# Altium PCB PCB_Bottom_Rev2.PcbDoc
Units mil, origin at the board's own origin, x right, y up, seen from the top; angles counter-clockwise.
Board outline 1110.07 x 1401.52 mil, 2 copper layers (Top Layer, Bottom Layer), stack 61.2 mil thick; 21 components, 19 nets, 80 pads, 19 vias.
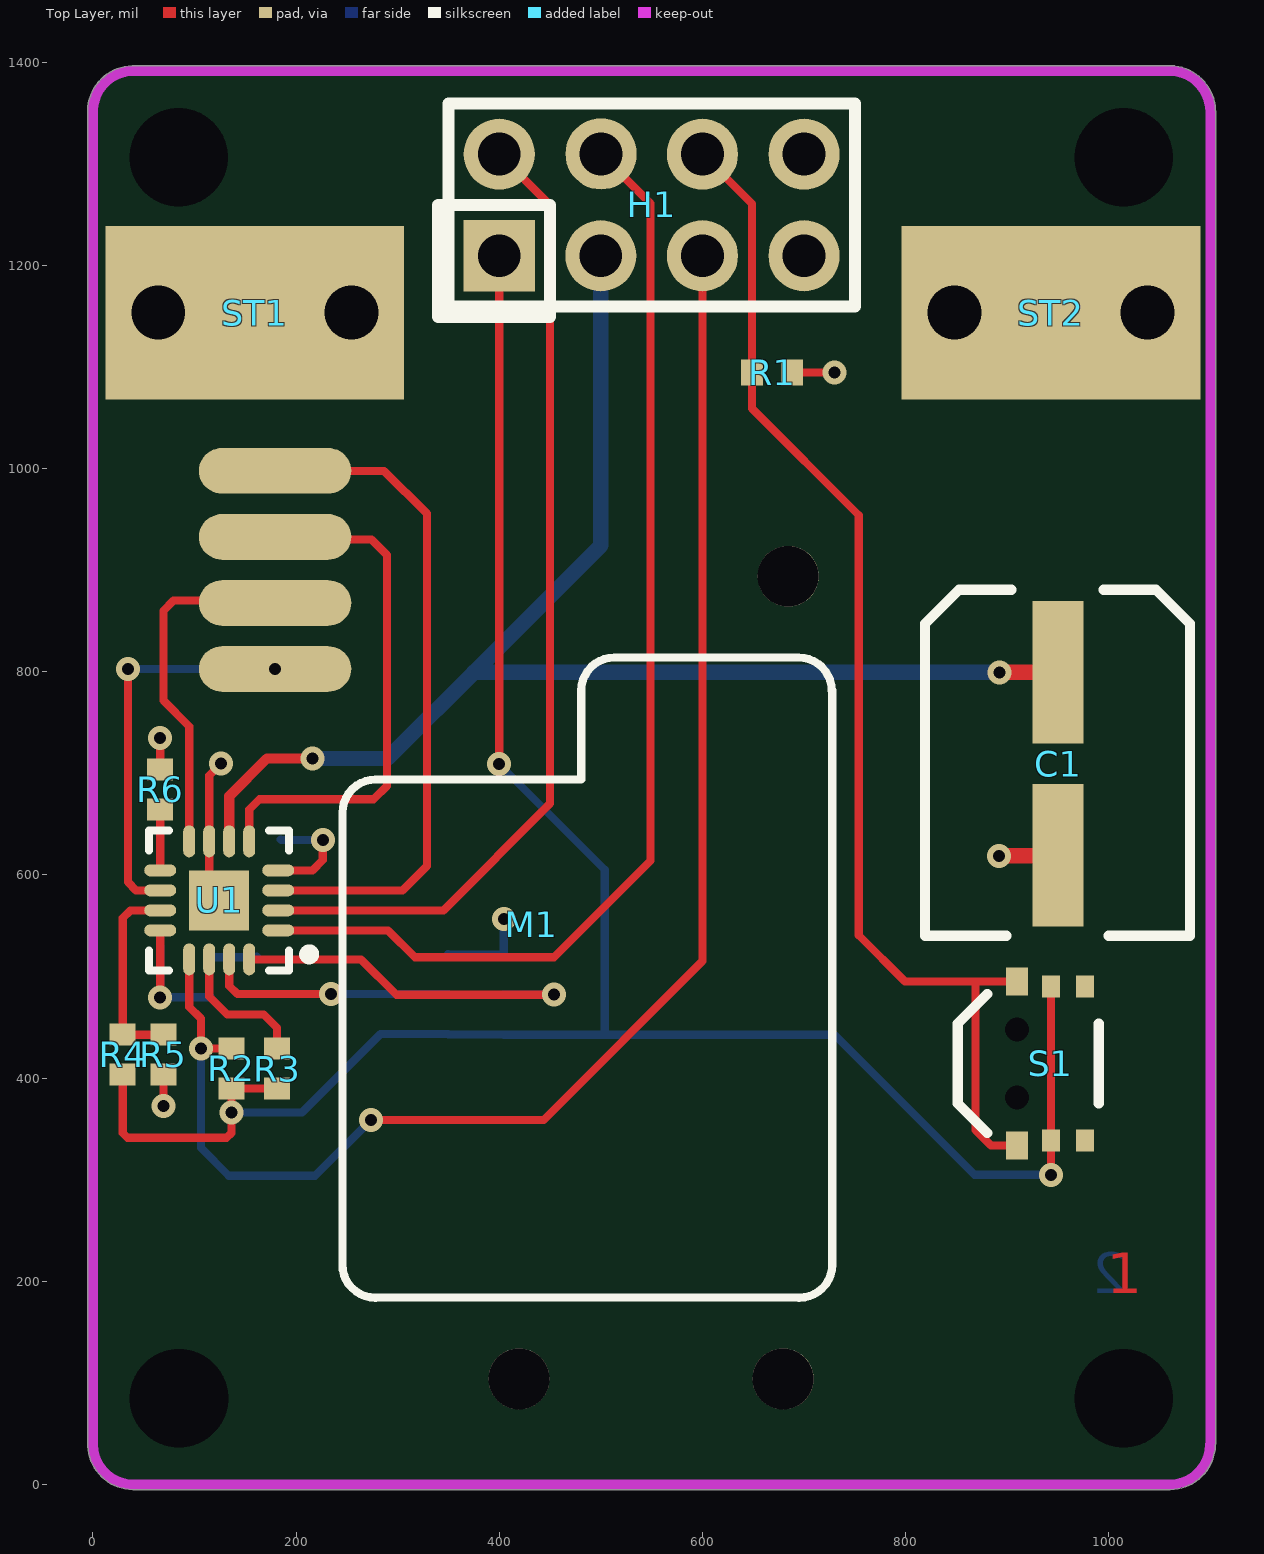
[diagram p0: Top Layer view]
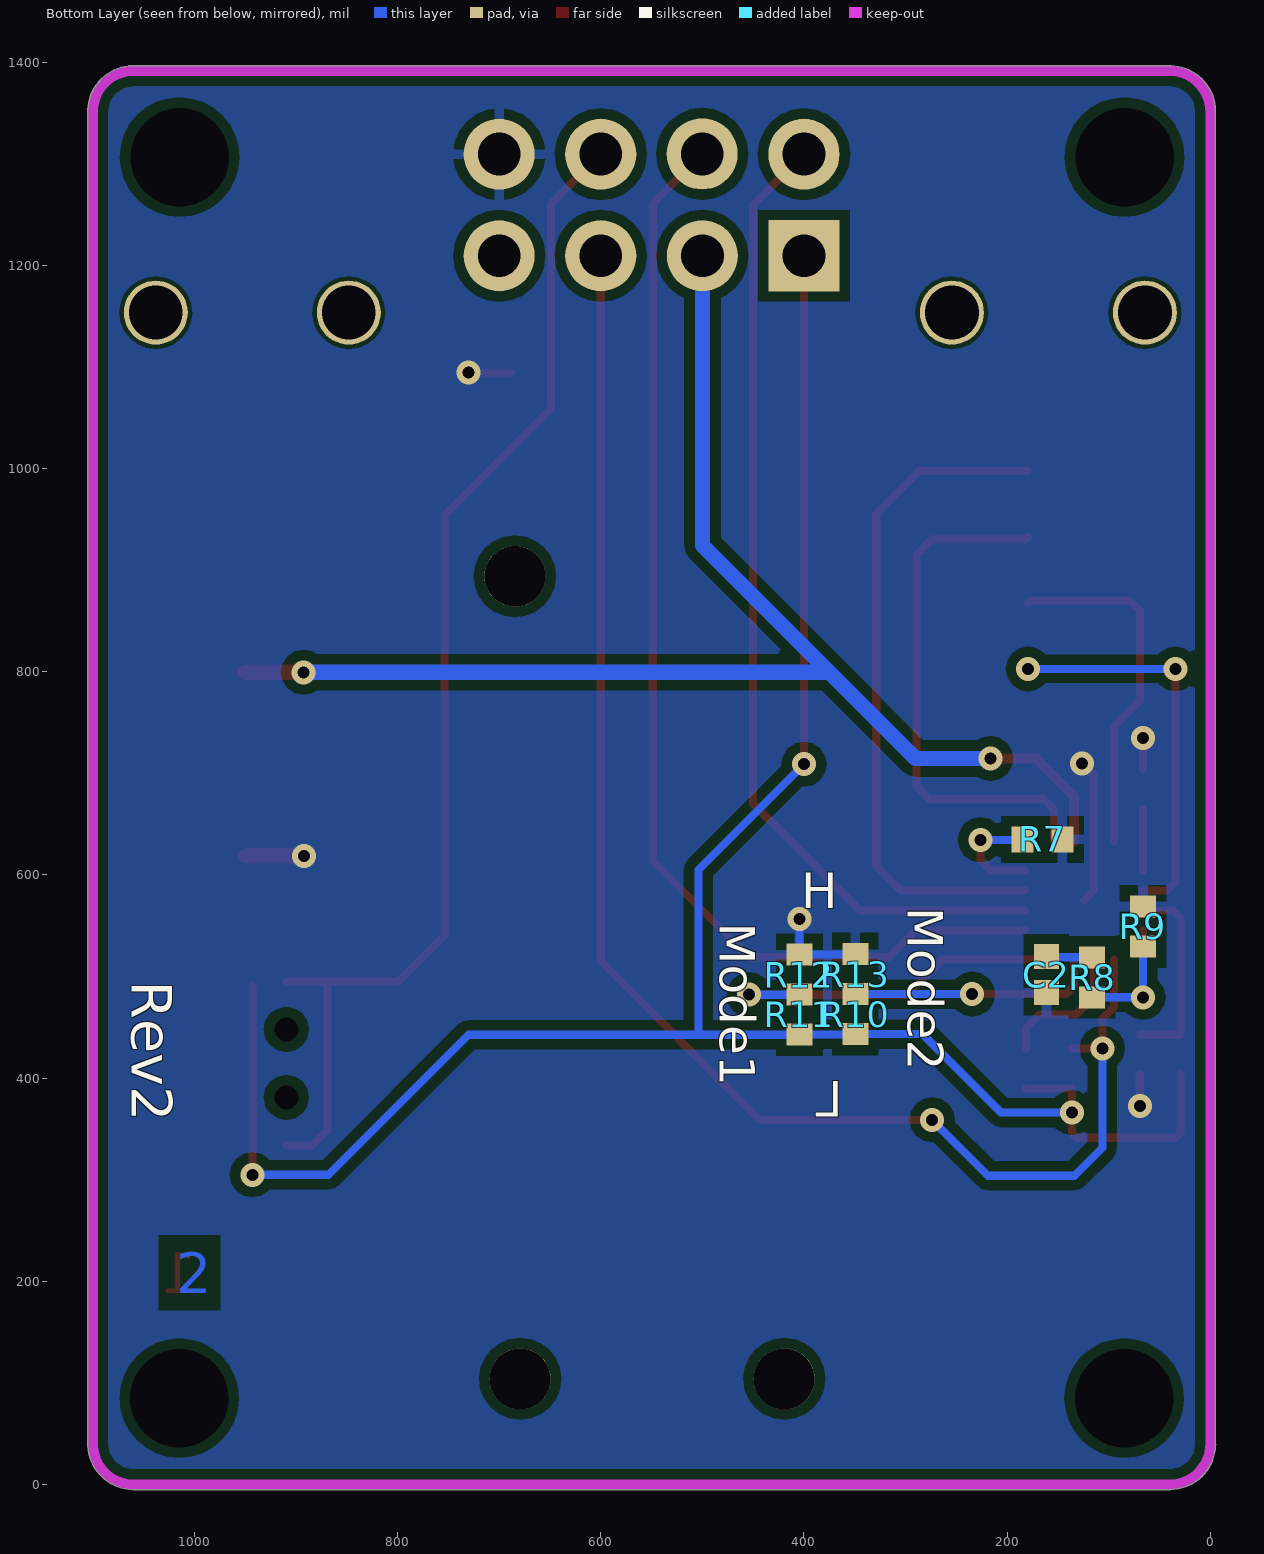
[diagram p1: Bottom Layer view, seen from below]
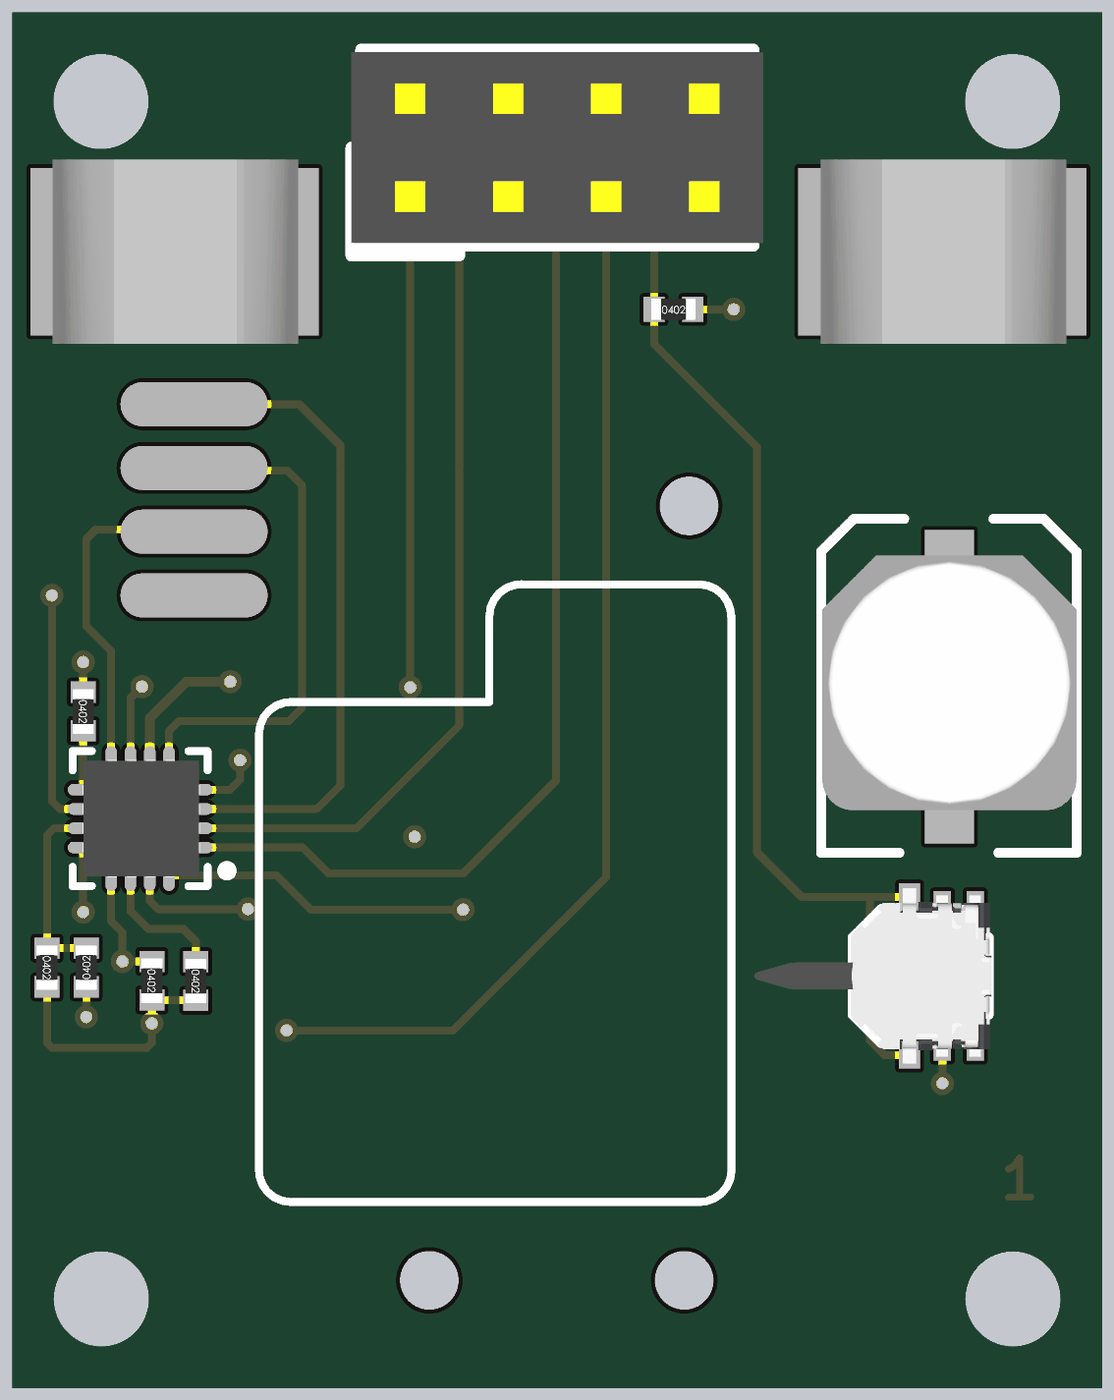
[diagram p2: 3D render of the assembled board from above, using the file's embedded part models]
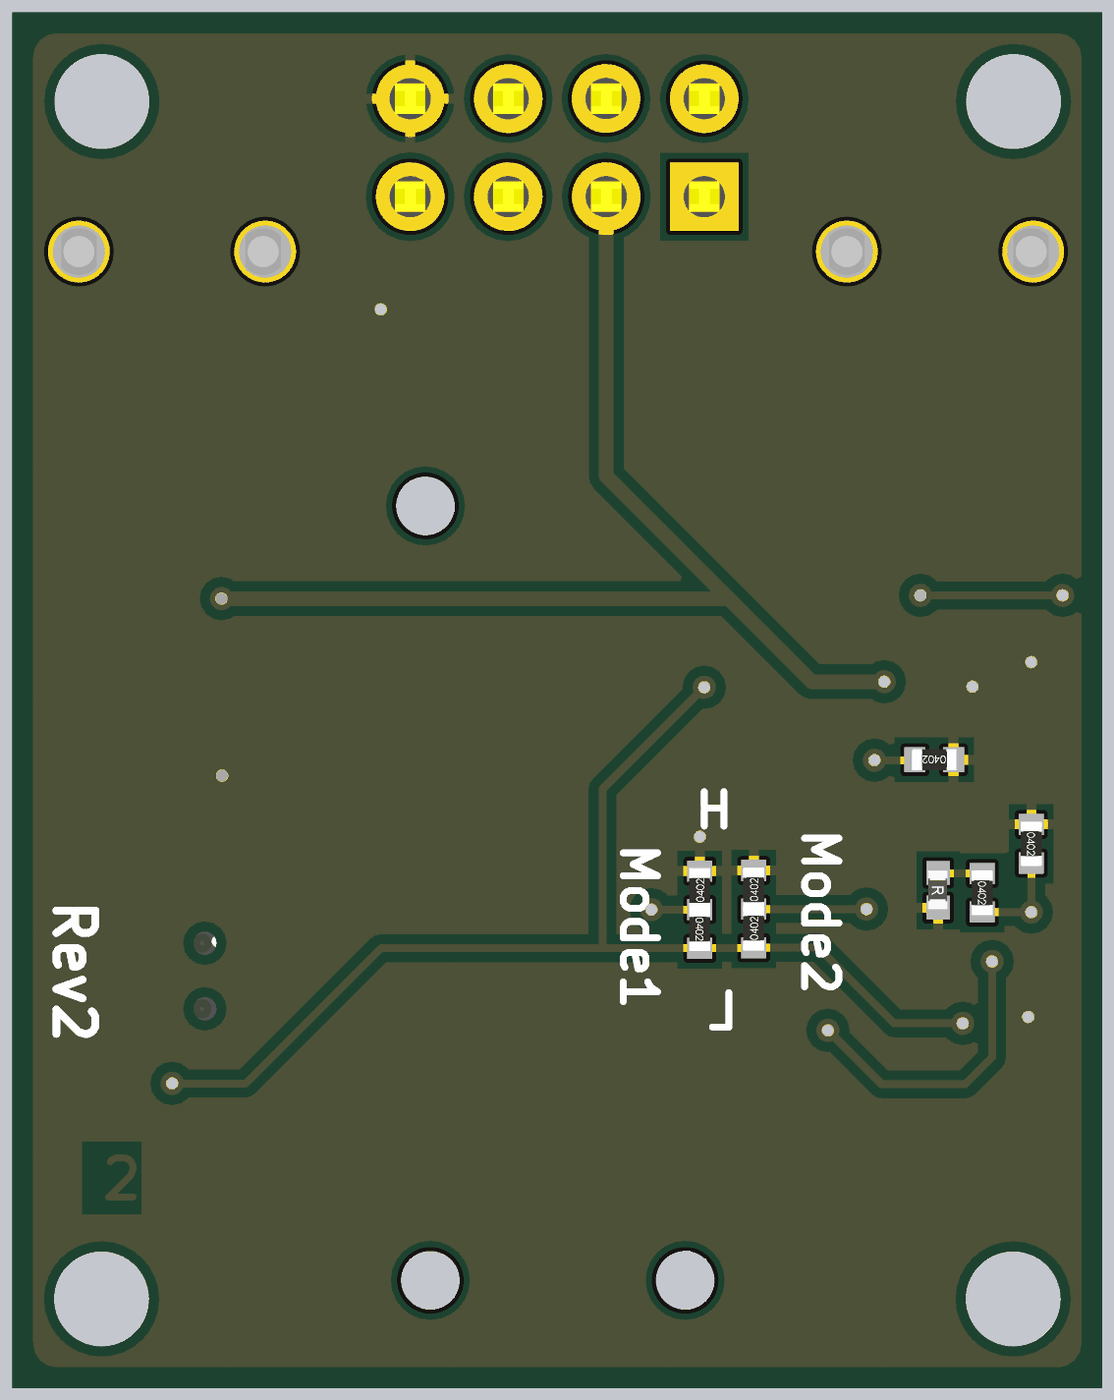
[diagram p3: 3D render of the assembled board from below, using the file's embedded part models]

## Layer stack, top to bottom
Top Solder: solder mask 0.4, Solder Resist, Dk 3.5
Top Layer: signal copper 1.4
Dielectric 1: dielectric 58.4, FR-4, Dk 4.8
Bottom Layer: signal copper 1.4
Bottom Solder: solder mask 0.4, Solder Resist, Dk 3.5

## Board outline
-5.01,37.9 cw(c39.96,40) -5.01,38.05 cw(c39.96,40) -5.05,39.4 cw(c-0.04,39.46) -5.02,40.06 -5.02,939.5 -5.02,1351.99 cw(c0,1351.99) -5.02,1352.06 cw(c40,1351.46) 38.76,1396.45 cw(c39.46,1391.49) 39.46,1396.5 1060.46,1396.5 cw(c1060.46,1391.49) 1061.17,1396.45 cw(c1059.93,1351.46) 1104.92,1352.96 cw(c1100,1351.99) 1105.01,1351.99 1105.01,39.46 cw(c1100,39.46) 1104.88,38.29 cw(c1059.89,40) 1060.49,-5.01 cw(c1060.43,0) 1060.39,-5.01 39.43,-5.01 cw(c39.43,0) 39.36,-5.01 cw(c39.96,40) 39.17,-5.01 ccw(c39.35,0) 39.35,-5.01 39.43,-5.01 39.17,-5.01 cw(c39.96,40)

## Design rules (kind name [scope] priority, off if disabled: settings)
Clearance Clearance_Pem2 [InComponent('ST2')] p1: gap=4 ignorepadtopadclearanceinfootprint=FALSE
Clearance Clearance_Pem1 [InComponent('ST1')] p2: gap=4 ignorepadtopadclearanceinfootprint=FALSE
Clearance Clearance_U1 [All vs InComponent('U1')] p3: gap=7.5 ignorepadtopadclearanceinfootprint=FALSE
Clearance [All] p4: gap=10 ignorepadtopadclearanceinfootprint=FALSE except(0: Arc-Hole Track-Hole SMDPad-Hole THPad-Hole Via-Hole Fill-Hole Poly-Hole Region-Hole Text-Hole)
MinimumSolderMaskSliver [All] p1: minsoldermaskwidth=3
PolygonConnect PolygonConnect_Via [All vs (IsVia)] p1: connectstyle=Direct reliefconductorwidth=10 reliefentries=4 polygonreliefangle="90 Angle" airgapwidth=10
PolygonConnect [All] p2: connectstyle=Relief reliefconductorwidth=10 reliefentries=4 polygonreliefangle="90 Angle" airgapwidth=10
RoutingVias [All] p1: holewidth=28 width=50 viastyle="Through Hole" minholewidth=28 minwidth=50 maxholewidth=28 maxwidth=50
SilkToSilkClearance [All] p1: silktosilkclearance=4
SilkToSolderMaskClearance [IsPad] p1: minsilkscreentomaskgap=3 clearancetoexposedcopper=TRUE
SolderMaskExpansion [All] p1: expansion=4 istentingtop=FALSE
Width [All] p1: maxlimit=50 minlimit=8 preferedwidth=8
27 further rules are at their usual default settings.

## Components (designator, comment, footprint, x,y, rotation, side; value= is the part's Value field where it differs from the comment)
C1 "220uF SMT" CAP_SM_CAN_0.250_DIA 950,799.43 r0 top
C2 "22nF" CAPC1005X56N 161.35,501.89 r270 bottom
H1 "CON4X2" RCPT2X4 550,1259.53 r90 top value="Female 4X2" (schematic designator H?)
M1 "Linear Motor" Motor_Mini_Linear_1 419.46,103.96 r90 top locked
R1 "10K" RESC1005X40L 668.52,1094.43 r0 top
R2 "47K" RESC1005X40L 136.35,409.6 r270 top
R3 "10K" RESC1005X40L 181.35,409.29 r270 top
R4 "90.9K" RESC1005X40L 29.46,423.03 r270 top
R5 "5K" RESC1005X40L 69.46,423.03 r90 top
R6 "0.2R" RESC1005X40L 66.35,684.29 r270 top
R7 "0.2R" RESC1005X40L 165.31,635 r0 bottom
R8 "1K" RESC1005X40L 116.35,499.29 r270 bottom
R9 "10K" RESC1005X40L 66.35,549.29 r270 bottom
R10 "10K" RESC1005X40L 349.5,463.03 r90 bottom
R11 "10K" RESC1005X40L 404.5,462.4 r270 bottom
R12 "10K" RESC1005X40L 404.5,501.77 r90 bottom
R13 "10K" RESC1005X40L 349.5,502.4 r90 bottom
S1 "PushButton" SSCQ110100 909.46,414.43 r90 top
ST1 "Standoff RA" SMTRA440-9-6ET 254.46,1153.43 r180 top value="RA Mount"
ST2 "Standoff RA" SMTRA440-9-6ET 1038,1153.43 r180 top value="RA Mount"
U1 "STSPIN220" 16QFN 124.42,575 r180 top

## Footprints (in the part's own frame and the unit in brackets; to place one, negate y for a bottom-side part, rotate by r counter-clockwise, add the part's x,y. Pads: shape width x height; smd on the part's side, far side on the other; paste and mask are expansions set on the pad)
16QFN [mm] "16QFN"
  oval 0.8x0.3 smd: 1(-1.475,0.75) 2(-1.475,0.25) 3(-1.475,-0.25) 4(-1.475,-0.75) 9(1.475,-0.75) 10(1.475,-0.25) 11(1.475,0.25) 12(1.475,0.75)
  oval 0.3x0.8 smd: 5(-0.75,-1.475) 6(-0.25,-1.475) 7(0.25,-1.475) 8(0.75,-1.475) 13(0.75,1.475) 14(0.25,1.475) 15(-0.25,1.475) 16(-0.75,1.475)
  rect 1.5x1.5 smd paste-1.05: 17(0,0)
  silkscreen extent -2.38,-1.75 1.75,1.75, body extent -1.55,-1.52 1.49,1.52, height 0.9
CAP_SM_CAN_0.250_DIA [mil] "SMD Eledtrolytic Capacitor 0.250 DIA"
  rect 50x140 smd: 1(0,0) 2(0,-180)
  silkscreen extent -131,-259 130,81, body extent -130,-216 130,44, height 240
CAPC1005X56N [mm] "Chip Capacitor, 2-Leads, Body 1.0x0.5mm, IPC Medium Density (0402 ceramic)"
  rect 0.62x0.62 smd: 1(-0.45,0) 2(0.45,0)
  body extent -0.55,-0.3 0.55,0.3, height 0.6
Motor_Mini_Linear_1 [mil] "SMT"
  oval 45x150 smd: 1(893.75,240) 2(828.75,240) 3(763.75,240) 4(698.75,240)
  round 60 hole 60 unplated: ""(0,0) ""(0,-260) ""(790,-265)
  silkscreen extent 80,-308 710,174
RCPT2X4 [mil]
  rect 70x70 hole 42.13: 1(-50.1,150)
  round 70 hole 42.13: 2(49.9,150) 3(-50.1,50) 4(50.1,49.8) 5(-50.1,-50) 6(49.9,-50) 7(-50.1,-150) 8(49.9,-150)
  silkscreen extent -110,-200 100,210, body extent -98,-210 97,210, height 337
RESC1005X40L [mm] "Chip Resistor, 2-Leads, Body 1.0x0.5mm, IPC Medium Density (0402)"
  rect 0.55x0.65 smd: 1(-0.5,0) 2(0.5,0)
  body extent -0.57,-0.27 0.58,0.28, height 0.41
SMTRA440-9-6ET [mil] "STANDOFF PCB RA 440 SMT"
  round 63 hole 53: ""(0,0) ""(190,0)
  rect 294x171 smd: ""(95,0)
  body extent -31,-94 219,94, height 390
SSCQ110100 [mm] "SWITCH DETECT, DUAL, SMD,R/A"
  rect 0.7x0.55 smd: 1(-2.05,0) 1(2.05,0)
  rect 0.54x0.45 smd: 2(-1.925,-0.85) 2(1.925,-0.85) 3(-1.925,-1.7) 3(1.925,-1.7)
  round 0 hole 0.6 unplated: ""(-0.85,0) ""(0.85,0)
  silkscreen extent -1.74,-2.05 1.74,1.48, body extent -2.27,-2.12 2.28,4.03, height 1.53

## Part data
C1: library part CAP_ELEC_SMT, "CAP ELECTROLYTIC SMT"
C2: library part CAP_0402, "CAP 0402", Part_Footprint=0402, Vendor=LCSC
H1: library part CON4X2_F, "CONN REPT 4X2 POS .100\" RA", Manufacturer=CONNFLY, Part_Footprint=4X2, Part_Number=C92271, Vendor=LCSC
M1: library part Motor_Mini_Linear, "MTR,LINEAR,SMT", ComponentLink1Description=Link, ComponentLink1URL=https://www.aliexpress.com/item/4000084515397.html?spm=a2g0s.9042311.0.0.27424c4d28cMfv, Vendor=Aliexpress
R1 R10 R11 R12 R13: library part RES_0402, "RES 10K 0402", Manufacturer=Uniroyal, Part_Footprint=0402, Part_Number=C25744, Vendor=LCSC
R2 R3 R4 R5 R6 R7 R8 R9: library part RES_0402, "RES 0402", Part_Footprint=0402, Vendor=LCSC
S1: library part SSCQ110100, "SWITCH DETECT, DUAL, SMD,R/A", Manufacturer=Alps, Part_Footprint=SMD, Part_Number=C231760, Vendor=LCSC
ST1 ST2: library part SMTRA440-9-6ET, "STANDOFF PCB RA 440 SMT", Manufacturer=PENN, Part_Footprint=RA, Part_Number=SMTRA440-9-6ET
U1: "IC STEPPER MOTOR DRIVER 16-VFQFPN(3x3)", Manufacturer="ST Micro", Part_Footprint=16-VFQFPM(3x3), Part_Number=STSPIN220, Vendor=Digi-Key

## Free pads (board coordinates)
  round 0 hole 97 unplated: 17(84.46,1306.49) 17(84.81,85) 17(1014.54,1306.49) 17(1014.89,85)

## Via types
v1: diameter 23.62, hole 11.81, Top Layer to Bottom Layer, tented both sides, 19 vias

## Nets (pads, with @x,y where several pads share a name; then routed paths per layer and width w, separated by ;. In a path a pad name is that pad's centre, name@x,y a point inside that pad or via, vN(x,y) a via of type N, cw(c..) or ccw(c..) an arc to the next point about the centre after c; other vN are vias at no path point)
+3.3V: H1.1 R2.2 R3.2 R4.2 R10.1 R11.2 S1.2 | length 2148.2
  Top Layer w8: R4.2 29.46,345.99 34.15,341.31 131.67,341.31 136.35,345.99 v1(136.35,366.08) R2.2 136.51,389.76 181.19,389.76 R3.2 ; v1(400,708.96) H1.1 ; v1(942.93,304.87) 942.93,338.64 S1.2@942.93,490.22
  Bottom Layer w8: v1(136.35,366.08) 205.95,366.08 283.21,443.34 R10.1 349.82,443.03 404.19,443.03 R11.2 503.83,442.71 ; v1(400,708.96) 503.83,605.13 503.83,442.71 ; v1(942.93,304.87) 867.93,304.87 730.08,442.71 503.83,442.71
DIR_2: H1.4 U1.1 | length 1132.5
  Top Layer w8: U1.1 290.48,545.47 316.99,518.96 453.83,518.96 548.83,613.96 548.83,1260.99 H1.4
EN_2: H1.5 R2.1 U1.13 | length 1507
  Top Layer w8: U1.13 94.9,470.1 106.35,458.65 v1(106.35,429.29) R2.1 ; v1(273.83,358.96) 443.83,358.96 600,515.13 H1.5
  Bottom Layer w8: v1(106.35,429.29) 106.35,331.44 133.83,303.96 218.83,303.96 v1(273.83,358.96)
GND: C1.2 C2.2 H1.8 R1.2 R5.1 R6.1 R7.1 R9.1 R12.2 R13.2 U1.7 U1.17 | length 395.2
  Top Layer w8: R6.1 v1(66.35,734.6) ; v1(69.46,372.71) R5.1 ; U1.17 114.58,584.84 U1.7 114.58,697.83 v1(126.35,709.6) ; R1.2 v1(730,1094.43) ; C1.2@949.37,618.8 C1.2
  Top Layer w15: v1(891.9,618.8) C1.2@949.37,618.8
  Bottom Layer w8: R13.2 349.82,521.77 404.19,521.77 R12.2 v1(404.5,556.45)
Limit_2: H1.6 R1.1 S1.1 | length 1199.4
  Top Layer w8: H1.6 648.83,1260.6 R1.1 648.83,1058.96 753.83,953.96 753.83,540.59 799.29,495.14 868.83,495.14 S1.1@909.46,495.14 ; 868.83,494.43 868.83,348.96 884.08,333.72 S1.1@909.46,333.72
MODE1: R11.1 R12.1 U1.16 | length 363.7
  Top Layer w8: U1.16 264.03,516.93 298.87,482.08 v1(453.87,482.08)
  Bottom Layer w8: R11.1 v1(453.87,482.08)
MODE2: R10.2 R13.1 U1.15 | length 244.8
  Top Layer w8: U1.15 134.27,490.73 142.29,482.71 v1(234.46,482.71)
  Bottom Layer w8: v1(234.46,482.71) R10.2
NetC2_1: C2.1 R8.1 | length 45.3
  Bottom Layer w8: R8.1 160.72,518.97 C2.1
NetM1_1: M1.1 U1.3 | length 669.8
  Top Layer w8: M1.1 286.71,997.71 328.83,955.59 328.83,608.96 304.71,584.84 U1.3
NetM1_2: M1.2 U1.5 | length 521.2
  Top Layer w8: U1.5 153.95,664.53 163.95,674.53 276.35,674.53 289.42,687.6 289.42,915 274.42,930 182.18,930 M1.2
NetM1_3: M1.3 U1.8 | length 352.6
  Top Layer w8: U1.8 94.9,746.06 69.42,771.53 69.42,860 79.42,870 177.18,870 M1.3
NetM1_4: M1.4 U1.10 | length 390.1
  Top Layer w8: v1(34.46,802.71) 34.46,592.88 42.5,584.84 U1.10
  Bottom Layer w8: v1(34.46,802.71) v1(179.46,802.71)
NetR3_1: R3.1 U1.14 | length 136.7
  Top Layer w8: U1.14 114.58,480.42 132.29,462.71 168.24,462.71 181.35,449.6 181.35,430.86 R3.1
NetR4_1: R4.1 R5.2 U1.11 | length 195
  Top Layer w8: U1.11 36.91,565.16 29.46,557.71 R4.1 R5.2
NetR6_2: R6.2 U1.9 | length 60.1
  Top Layer w8: U1.9 R6.2
NetR7_2: R7.2 U1.4 | length 109.5
  Top Layer w8: U1.4 216.35,604.53 226.35,614.53 v1(226.35,634.53)
  Bottom Layer w8: R7.2 185.47,634.53 v1(226.35,634.53)
NetR8_2: R8.2 R9.2 U1.12 | length 165.9
  Top Layer w8: v1(66.35,479.6) U1.12
  Bottom Layer w8: R9.2 v1(66.35,479.6) R8.2
STCK_2: H1.2 U1.2 | length 971
  Top Layer w8: U1.2 345.03,565.16 450,670.13 450,1259.43 H1.2
VMOT: C1.1 H1.3 U1.6 | length 1372.5
  Top Layer w10: U1.6 134.27,677.52 171.35,714.6 v1(216.35,714.6)
  Top Layer w15: v1(892.53,799.43) C1.1
  Bottom Layer w15: v1(216.35,714.6) 290.17,714.6 300,724.43 375,799.43 ; H1.3 500,924.43 375,799.43 ; v1(892.53,799.43) 375,799.43
pads on no net: H1.7 M1. S1. S1.3 ST1. ST2.

## Polygon pours and split planes (outlines as drawn)
GND on Bottom Layer "NONET_L-01_P-001" (solid, pour order 0): 1100,1388.96 1100,-5.01 0,-5.01 0,1388.96

## Keep-outs
Keep-Out Layer:
  lines w10: -0.04,39.46 ccw(c39.96,40) 39.43,0 ; 0,38.2 0,939.5 0,1351.99 cw(c40,1351.46) 39.46,1391.45 ; 39.35,0 1060.43,0 ccw(c1059.89,40) 1099.89,39.46 ; 39.46,1391.49 1060.46,1391.49 ; 1060.46,1391.45 cw(c1059.93,1351.46) 1099.93,1351.99 ; 1100,39.46 1100,1351.99

## Other copper
Top Layer:
  text "1" at 998,188.5 h40
Bottom Layer:
  text "2" at 1018,188.5 h40

## Silkscreen, mask and mechanical layers (free items; w line width, h text height)
Bottom Overlay:
  text "Mode2" at 298,568 h35 r90
  text "H" at 367,567 h35
  text "Mode1" at 483,553 h35 r90
  text "Rev2" at 1061.46,495.96 h40 r90
  text "L" at 362,362 h35
Mechanical 1:
  lines w10: -0.04,39.46 ccw(c39.96,40) 39.43,0 ; 0,38.2 0,939.5 0,1351.99 cw(c40,1351.46) 39.46,1391.45 ; 39.35,0 1060.43,0 ccw(c1059.89,40) 1099.89,39.46 ; 39.46,1391.49 1060.46,1391.49 ; 1060.46,1391.45 cw(c1059.93,1351.46) 1099.93,1351.99 ; 1100,39.46 1100,1351.99